# EAGLE board Rocket Controller ver1.0.0 (EAGLE 9.6.2)
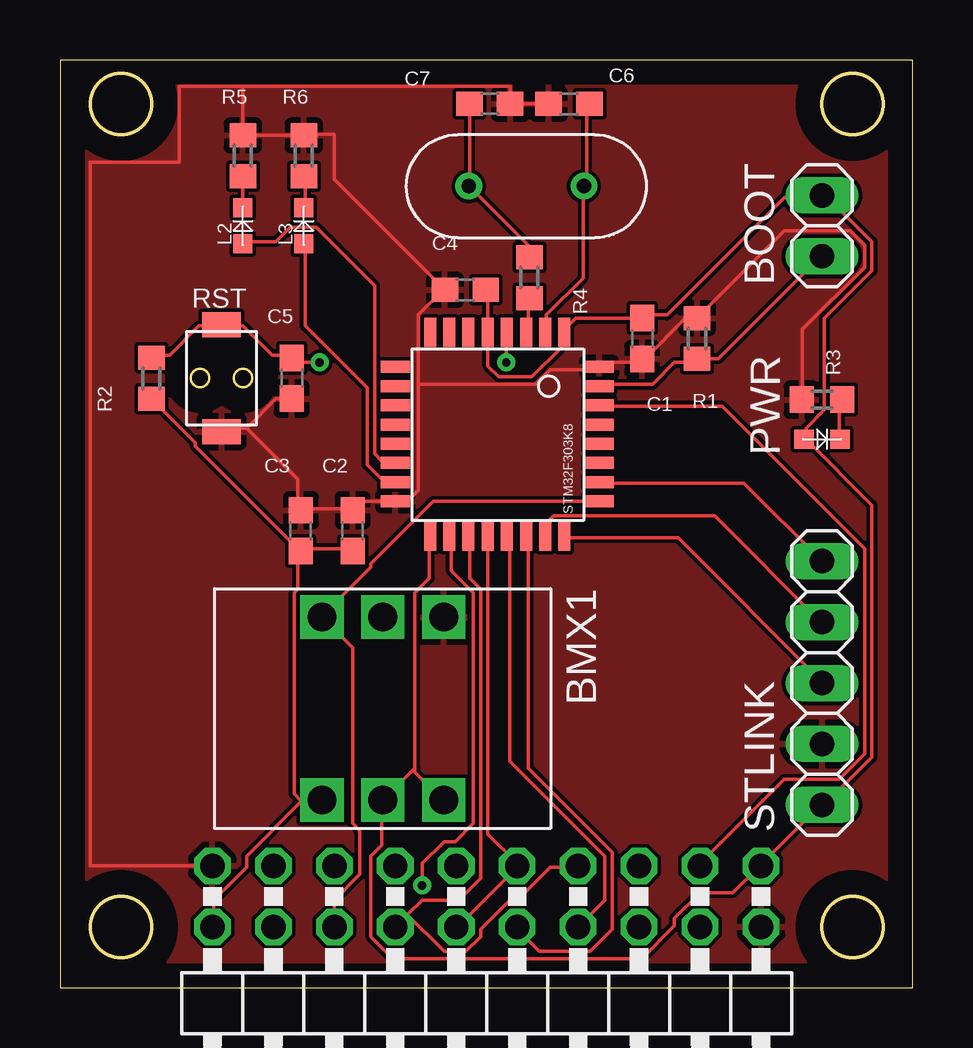
[diagram p0: board, top side]
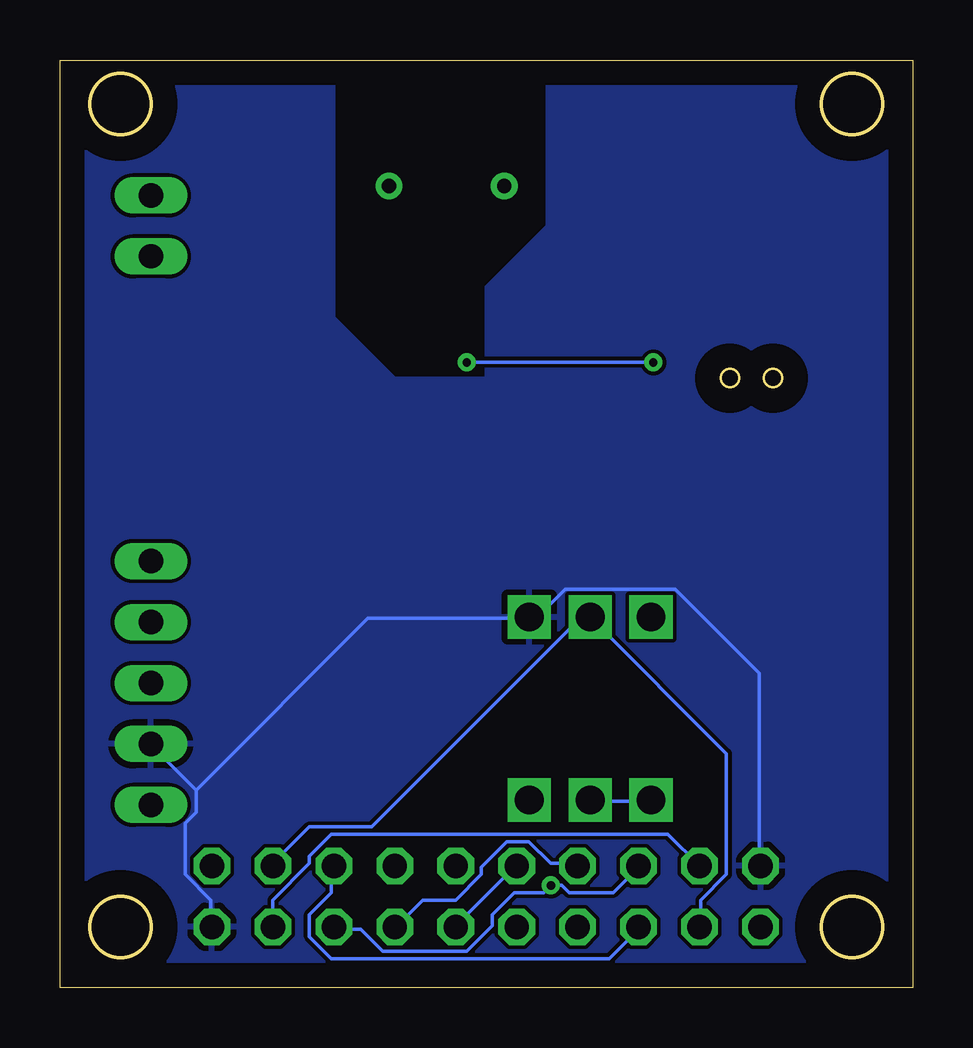
[diagram p1: board, bottom side, seen from below]

Size 35.54 x 38.66 mm. Coordinates in mm from the lower left corner, seen from the top.
Outline: 0,0 35.54,0 35.54,38.66 0,38.66 0,0
Outline: circle at 2.54,2.54 radius 1.27
Outline: circle at 33.02,2.54 radius 1.27
Outline: circle at 2.54,36.83 radius 1.27
Outline: circle at 33.02,36.83 radius 1.27
Copper layers (1*16): Top 0.035mm / dielectric 1.5mm / Bottom 0.035mm
Design rules "default": minimum track width 6mil, minimum drill 0.35mm, track to track 6mil, track to pad 6mil, pad to pad 6mil, via to via 6mil, smd to smd 6mil, copper to edge 40mil, drill to drill 6mil, minimum pad ring 10mil, minimum via ring 8mil, stop-mask expansion 4mil, vias tented up to drill 0mil, thermal gap 10mil

## Footprints (pad centres in the part's own frame; a part is rotated, then mirrored left to right if it is on the bottom)
BMX055 = drill 1.2 pad 1.5 square: 3V3 8.81,-9.53; GND 1.19,-4.46; SCL 1.19,-9.53; SDA 1.19,-7; VCC 8.81,-4.46; VCCIO 8.81,-7
1X02 = drill 1.016 long: 1 -1.27,0; 2 1.27,0
C1608 = smd 1.1 x 1: 1 -0.85,0; 2 0.85,0
CRYSTAL = drill 0.6: P$1 2.4,0; P$2 -2.4,0
2X10/90 = drill 1.016 octagon: 1 -11.43,-6.35; 2 -11.43,-3.81; 3 -8.89,-6.35; 4 -8.89,-3.81; 5 -6.35,-6.35; 6 -6.35,-3.81; 7 -3.81,-6.35; 8 -3.81,-3.81; 9 -1.27,-6.35; 10 -1.27,-3.81; 11 1.27,-6.35; 12 1.27,-3.81; 13 3.81,-6.35; 14 3.81,-3.81; 15 6.35,-6.35; 16 6.35,-3.81; 17 8.89,-6.35; 18 8.89,-3.81; 19 11.43,-6.35; 20 11.43,-3.81
OSXX1608C1A = smd 0.8 x 0.8: AN -0.75,0; CT 0.75,0
R0603 = smd 1 x 1.1: 1 -0.85,0; 2 0.85,0
TVAF06-A020B-R = smd 1.6 x 1.05: P$1 0,2.225; P$2 0,-2.225
1X05 = drill 1.016 long: 1 -5.08,0; 2 -2.54,0; 3 0,0; 4 2.54,0; 5 5.08,0
STM32F303K8 = smd 0.5 x 1.2: BOOT 1.6,8.5; PA3/UART2_RX 0.8,0; PA4/SPI1_NSS 1.6,0; PA5/SPI1_SCK 2.4,0; PA6/SPI1_MISO 3.2,0; PA7/SPI1_MOSI 4,0; PA15/I2C1_SCL 6.4,8.5; PB0 4.8,0; PB1 5.6,0; PB3/SWO 5.6,8.5; PB4 4.8,8.5; PB5 4,8.5; PB6 3.2,8.5; PB7/I2C1_SDA 2.4,8.5; VSS 0.8,8.5; VSS2 6.4,0 | smd 1.2 x 0.5: NRST -0.65,4.65; PA0 -0.65,3.05; PA1 -0.65,2.25; PA2/UART2_TX -0.65,1.45; PA8 7.85,2.25; PA9/UART1_TX 7.85,3.05; PA10/UART1_RX 7.85,3.85; PA11/CAN_RX 7.85,4.65; PA12/CAN_TX 7.85,5.45; PA13/SWDIO 7.85,6.25; PA14/SWCLK 7.85,7.05; PF0 -0.65,6.25; PF1 -0.65,5.45; VDD -0.65,7.05; VDD2 7.85,1.45; VDDA -0.65,3.85

## Placement (x,y rotation side)
BMX1  BMX055  [BMX055]  20.45,16.64 270 top
BOOT  [1X02]  31.75,31.75 270 top
C1  100nF  [C1608]  24.26,27.05 270 top
C2  100nF  [C1608]  12.19,19.05 90 top
C3  4.7uF  [C1608]  10.03,19.05 90 top
C4  10nF  [C1608]  16.89,29.08 180 top
C5  0.1uF  [C1608]  9.65,25.4 270 top
C6  30pF  [C1608]  21.21,36.83 180 top
C7  30pF  [C1608]  17.91,36.83 0 top
CRY1  [CRYSTAL]  19.43,33.4 0 top
JP3  [2X10/90]  17.78,-1.27 180 top
L2  [OSXX1608C1A]  7.62,31.75 90 top
L3  [OSXX1608C1A]  10.16,31.75 90 top
PWR  [OSXX1608C1A]  31.75,22.86 0 top
R1  10k  [R0603]  26.54,27.05 90 top
R2  10k or DNF  [R0603]  3.81,25.4 270 top
R3  100  [R0603]  31.75,24.51 0 top
R4  DNF  [R0603]  19.56,29.59 270 top
R5  100  [R0603]  7.62,34.67 270 top
R6  100  [R0603]  10.16,34.67 270 top
RST  [TVAF06-A020B-R]  6.73,25.4 0 top
STLINK  [1X05]  31.75,12.7 270 top
U$1  STM32F303K8  [STM32F303K8]  13.97,26.67 270 top

## Library data of the parts
BMX1 = BMX055
BOOT JP3 STLINK = pinhead
C1-C7 = rcl; SPICEPREFIX: C
CRY1 = Crystal
L2 L3 PWR = Chip LED
R1-R6 = rcl; SPICEPREFIX: R
RST = Tact switch
U$1 = STM32F303K8

## Nets
+3V3: BMX1.3V3 BMX1.VCC BMX1.VCCIO BOOT.1 C1.1 C2.1 C3.1 C4.1 JP3.1 JP3.20 PWR.AN R2.2 STLINK.5 U$1.VDD U$1.VDD2 U$1.VDDA
BIT1: JP3.10 JP3.11 U$1.PA12/CAN_TX
BIT2: JP3.8 JP3.13 U$1.PA11/CAN_RX
BOOT0: BOOT.2 R1.1 U$1.BOOT
GND: BMX1.GND C1.2 C2.2 C3.2 C4.2 C5.2 C6.2 C7.2 JP3.2 JP3.19 R1.2 R3.1 R5.1 R6.1 RST.P$2 STLINK.4 U$1.VSS U$1.VSS2
LED0: L2.AN U$1.PB0
LED1: L3.AN U$1.PB1
LOGRX: JP3.7 JP3.14 U$1.PA9/UART1_TX
LOGTX: JP3.9 JP3.12 U$1.PA10/UART1_RX
N$1: PWR.CT R3.2
N$2: L2.CT R5.2
N$3: C7.1 CRY1.P$2 R4.1
N$4: L3.CT R6.2
N$11: JP3.4 JP3.17
NRST: C5.1 R2.1 RST.P$1 U$1.NRST
OSC_IN: C6.1 CRY1.P$1 U$1.PF0
OSC_OUT: R4.2 U$1.PF1
PWM: JP3.6 JP3.15 U$1.PA8
SCL: BMX1.SCL JP3.5 JP3.16 U$1.PA15/I2C1_SCL
SDA: BMX1.SDA JP3.3 JP3.18 U$1.PB7/I2C1_SDA
SWCLK: STLINK.3 U$1.PA14/SWCLK
SWDIO: STLINK.2 U$1.PA13/SWDIO
SWO: STLINK.1 U$1.PB3/SWO

## Tracks (layer width: path | path; a pad name or v marks a point on that pad's centre or on a via)
+3V3
  Top 0.152: 14.78,9.14 14.78,8.99 15.85,7.92 BMX1.VCC | 14.78,9.14 14.78,16.46 15.39,17.07 15.39,18.75 U$1.VDD2 | 14.78,9.14 13.56,7.92 BMX1.VCCIO 13.41,7.77 13.41,5.94 12.95,5.49 12.95,2.13 13.87,1.22 24.23,1.22 25.6,2.59 25.6,2.9 26.67,3.96 28.04,3.96 29.11,5.03 JP3.1 29.26,5.18 31.7,7.62 STLINK.5 31.85,7.62 33.83,9.6 33.83,20.12 31.09,22.86 | C3.1 10.06,18.29 12.19,18.29 C2.1 | R2.2 3.81,24.54 5.64,22.71 5.64,22.55 9.91,18.29 C3.1 | 10.06,7.77 7.77,5.49 7.77,5.03 6.4,3.66 6.4,2.59 JP3.20 | 10.06,7.77 10.82,7.77 BMX1.3V3 10.06,7.77 | 10.06,7.77 9.75,8.08 9.75,16.46 9.91,16.61 9.91,18.14 C3.1 | C4.1 17.83,28.96 17.83,27.43 U$1.VDDA 17.83,27.28 17.83,25.91 18.29,25.45 19.66,25.45 20.88,26.67 20.88,27.28 U$1.VDD 21.03,27.43 21.49,27.89 24.23,27.89 C1.1 24.38,28.04 25.3,28.04 30.17,32.92 31.7,32.92 BOOT.1 31.85,33.07 33.83,31.09 33.83,29.87 31.85,27.89 31.85,24.08 31.09,23.32 31.09,22.86 | 31.09,22.86 PWR.AN
  Bottom 0.152: BMX1.VCCIO 13.41,7.77 10.97,7.77 BMX1.3V3
BIT1
  Top 0.152: U$1.PA12/CAN_TX 19.51,18.75 19.51,9.14 23.01,5.64 23.01,2.44 22.1,1.52 19.96,1.52 19.05,2.44 JP3.10
  Bottom 0.152: JP3.11 16.61,5.03 19.05,2.59 JP3.10
BIT2
  Top 0.152: JP3.8 22.71,3.66 22.71,5.49 18.75,9.45 18.75,18.75 U$1.PA11/CAN_RX
  Bottom 0.152: JP3.13 14.02,5.18 15.09,5.18 16,6.1 16.92,6.1 17.98,5.03 17.98,4.72 19.05,3.66 20.42,3.66 21.49,2.59 JP3.8
BOOT0
  Top 0.152: U$1.BOOT 22.55,25.15 24.69,25.15 25.6,26.06 26.52,26.06 R1.1 26.67,26.21 27.43,26.21 31.7,30.48 BOOT.2
GND
  Top 0.152: C6.2 C7.2 18.76,37.57 7.62,37.57 | 7.62,37.57 4.98,37.57 4.98,34.39 1.27,34.39 1.27,5.08 JP3.19 | 7.62,37.57 R5.1 R6.1 10.2,35.56 11.43,35.56 11.43,33.69 C4.2 16,29.11 14.94,28.04 14.94,25.15 | R3.1 30.94,24.54 30.94,27.43 33.53,30.02 33.53,30.94 32.92,31.55 30.17,31.55 26.67,28.04 R1.2 26.52,27.89 26.06,27.89 24.38,26.21 C1.2 24.23,26.06 22.71,26.06 22.55,25.91 U$1.VSS 22.4,25.76 20.42,25.76 19.81,25.15 14.94,25.15 | 12.19,19.96 10.06,19.96 C3.2 9.91,19.96 9.91,21.18 7.77,23.32 | 12.19,19.96 12.5,20.27 13.87,20.27 U$1.VSS2 14.02,20.42 14.63,20.42 14.94,20.73 14.94,25.15 | 12.19,19.96 C2.2 | 7.77,23.32 8.99,24.54 9.6,24.54 C5.2 | 7.77,23.32 6.86,23.32 RST.P$2
  Bottom 0.152: 29.87,8.23 29.87,7.32 30.33,6.86 30.33,4.72 29.26,3.66 29.26,2.59 JP3.2 | 29.87,8.23 31.7,10.06 STLINK.4 | 29.87,8.23 22.71,15.39 16,15.39 BMX1.GND 15.85,15.54 15.54,15.54 14.48,16.61 9.91,16.61 6.4,13.11 6.4,5.18 JP3.19
  pour Top: 0,39.37 36.83,39.37 36.83,-1.27 -1.27,-1.27 -1.27,39.37
  pour Bottom: -1.27,39.37 15.24,39.37 15.24,31.75 17.78,29.21 17.78,25.4 21.59,25.4 24.13,27.94 24.13,39.37 36.83,39.37 36.83,-1.27 -1.27,-1.27
LED0
  Top 0.152: L2.AN 7.62,31.09 8.99,31.09 9.6,31.7 10.67,31.7 13.11,29.26 13.11,22.25 13.41,21.95 13.87,21.95 U$1.PB0
LED1
  Top 0.152: L3.AN 10.21,30.94 10.21,27.58 12.8,24.99 12.8,21.79 13.41,21.18 13.87,21.18 U$1.PB1
LOGRX
  Top 0.152: 14.48,3.05 JP3.14 14.02,2.59 | 14.48,3.05 15.09,3.66 16.61,3.66 17.53,4.57 17.53,16.61 17.07,17.07 17.07,18.75 U$1.PA9/UART1_TX | 14.48,3.05 16,1.52 16.92,1.52 17.53,2.13 17.53,2.44 18.75,3.66 19.05,3.66 20.42,5.03 21.49,5.03 JP3.7
LOGTX
  Top 0.152: U$1.PA10/UART1_RX 17.83,18.75 17.83,6.4 19.05,5.18 JP3.9 19.05,5.03 16.61,2.59 JP3.12
N$1
  Top 0.152: PWR.CT 32.46,22.86 32.46,24.38 R3.2
N$2
  Top 0.152: R5.2 L2.CT
N$3
  Top 0.152: R4.1 19.51,30.48 19.51,30.94 17.07,33.38 CRY1.P$2 17.07,33.53 17.07,36.73 C7.1
N$4
  Top 0.152: L3.CT 10.21,32.61 10.21,33.68 R6.2
N$11
  Bottom 0.152: JP3.4 26.67,3.66 25.15,5.18 25.15,5.49 24.23,6.4 10.21,6.4 JP3.17
NRST  (via drill 0.35)
  Top 0.152: R2.1 3.81,26.36 4.57,26.36 5.79,27.58 6.71,27.58 RST.P$1 6.86,27.58 7.62,27.58 8.84,26.36 9.6,26.36 C5.1 9.75,26.21 9.91,26.06 v10.82,26.06 | v18.59,26.06 18.59,27.28 U$1.NRST
  Bottom 0.152: v10.82,26.06 v18.59,26.06
OSC_IN
  Top 0.152: C6.1 21.95,36.73 21.95,33.53 CRY1.P$1 21.79,33.38 21.79,29.57 20.27,28.04 20.27,27.43 U$1.PF0
OSC_OUT
  Top 0.152: R4.2 19.51,28.65 19.51,27.43 U$1.PF1
PWM  (via drill 0.35)
  Top 0.152: v15.09,4.27 15.09,5.18 16,6.1 16.46,6.1 17.22,6.86 17.22,16.46 16.31,17.37 16.31,18.75 U$1.PA8
  Bottom 0.152: JP3.15 11.43,5.03 12.5,3.96 14.33,3.96 14.63,4.27 v15.09,4.27 15.39,3.96 16.61,3.96 17.53,3.05 17.53,2.59 18.59,1.52 22.1,1.52 23.01,2.44 24.08,2.44 JP3.6
SCL
  Top 0.152: U$1.PA15/I2C1_SCL 22.4,20.27 15.54,20.27 12.95,17.68 12.95,17.53 10.97,15.54 BMX1.SCL 10.97,15.39 12.19,14.17 12.19,6.86 12.5,6.55 12.5,4.72 11.43,3.66 JP3.16
  Bottom 0.152: JP3.5 24.23,5.03 24.23,3.96 25.15,3.05 25.15,2.13 24.23,1.22 12.65,1.22 11.43,2.44 JP3.16
SDA
  Top 0.152: U$1.PB7/I2C1_SDA 22.55,24.23 27.58,24.23 33.53,18.29 33.53,9.75 32.46,8.69 30.17,8.69 26.67,5.18 JP3.3
  Bottom 0.152: JP3.18 8.84,2.59 8.84,3.66 7.77,4.72 7.77,9.75 13.41,15.39 BMX1.SDA 13.56,15.39 13.87,15.39 22.55,6.71 25.15,6.71 26.67,5.18 JP3.3
SWCLK
  Top 0.152: U$1.PA14/SWCLK 21.03,18.75 25.76,18.75 31.7,12.8 STLINK.3
SWDIO
  Top 0.152: U$1.PA13/SWDIO 20.27,18.9 20.27,19.36 20.57,19.66 27.28,19.66 31.7,15.24 STLINK.2
SWO
  Top 0.152: STLINK.1 28.5,21.03 22.55,21.03 U$1.PB3/SWO